# EAGLE board Print (EAGLE 9.6.2)
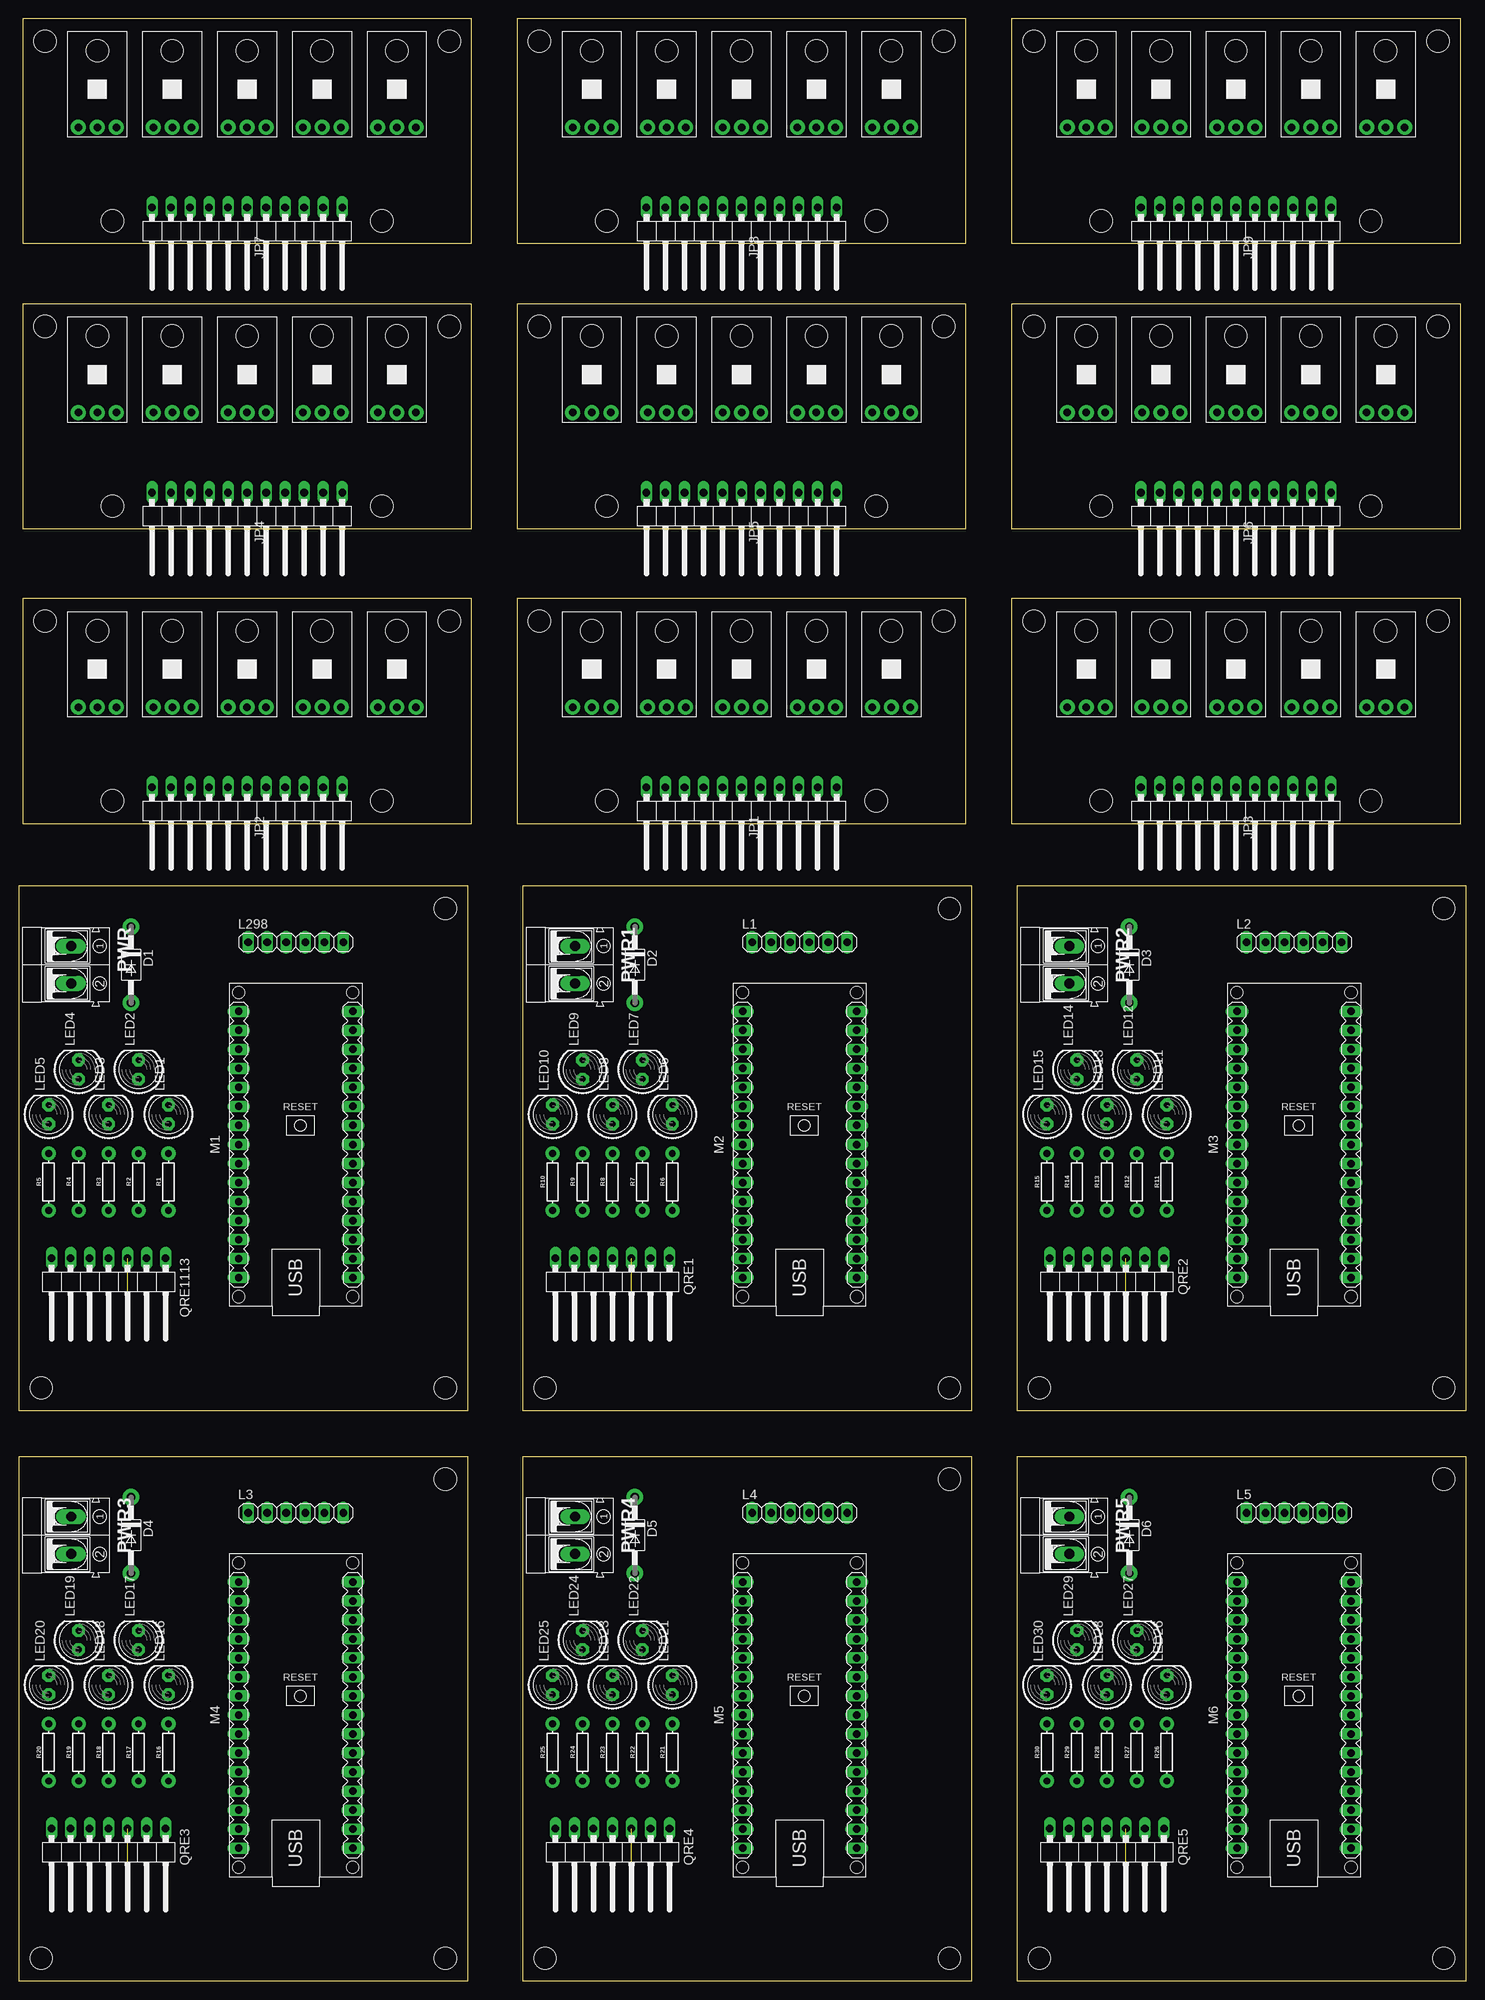
[diagram p0: board, top side]
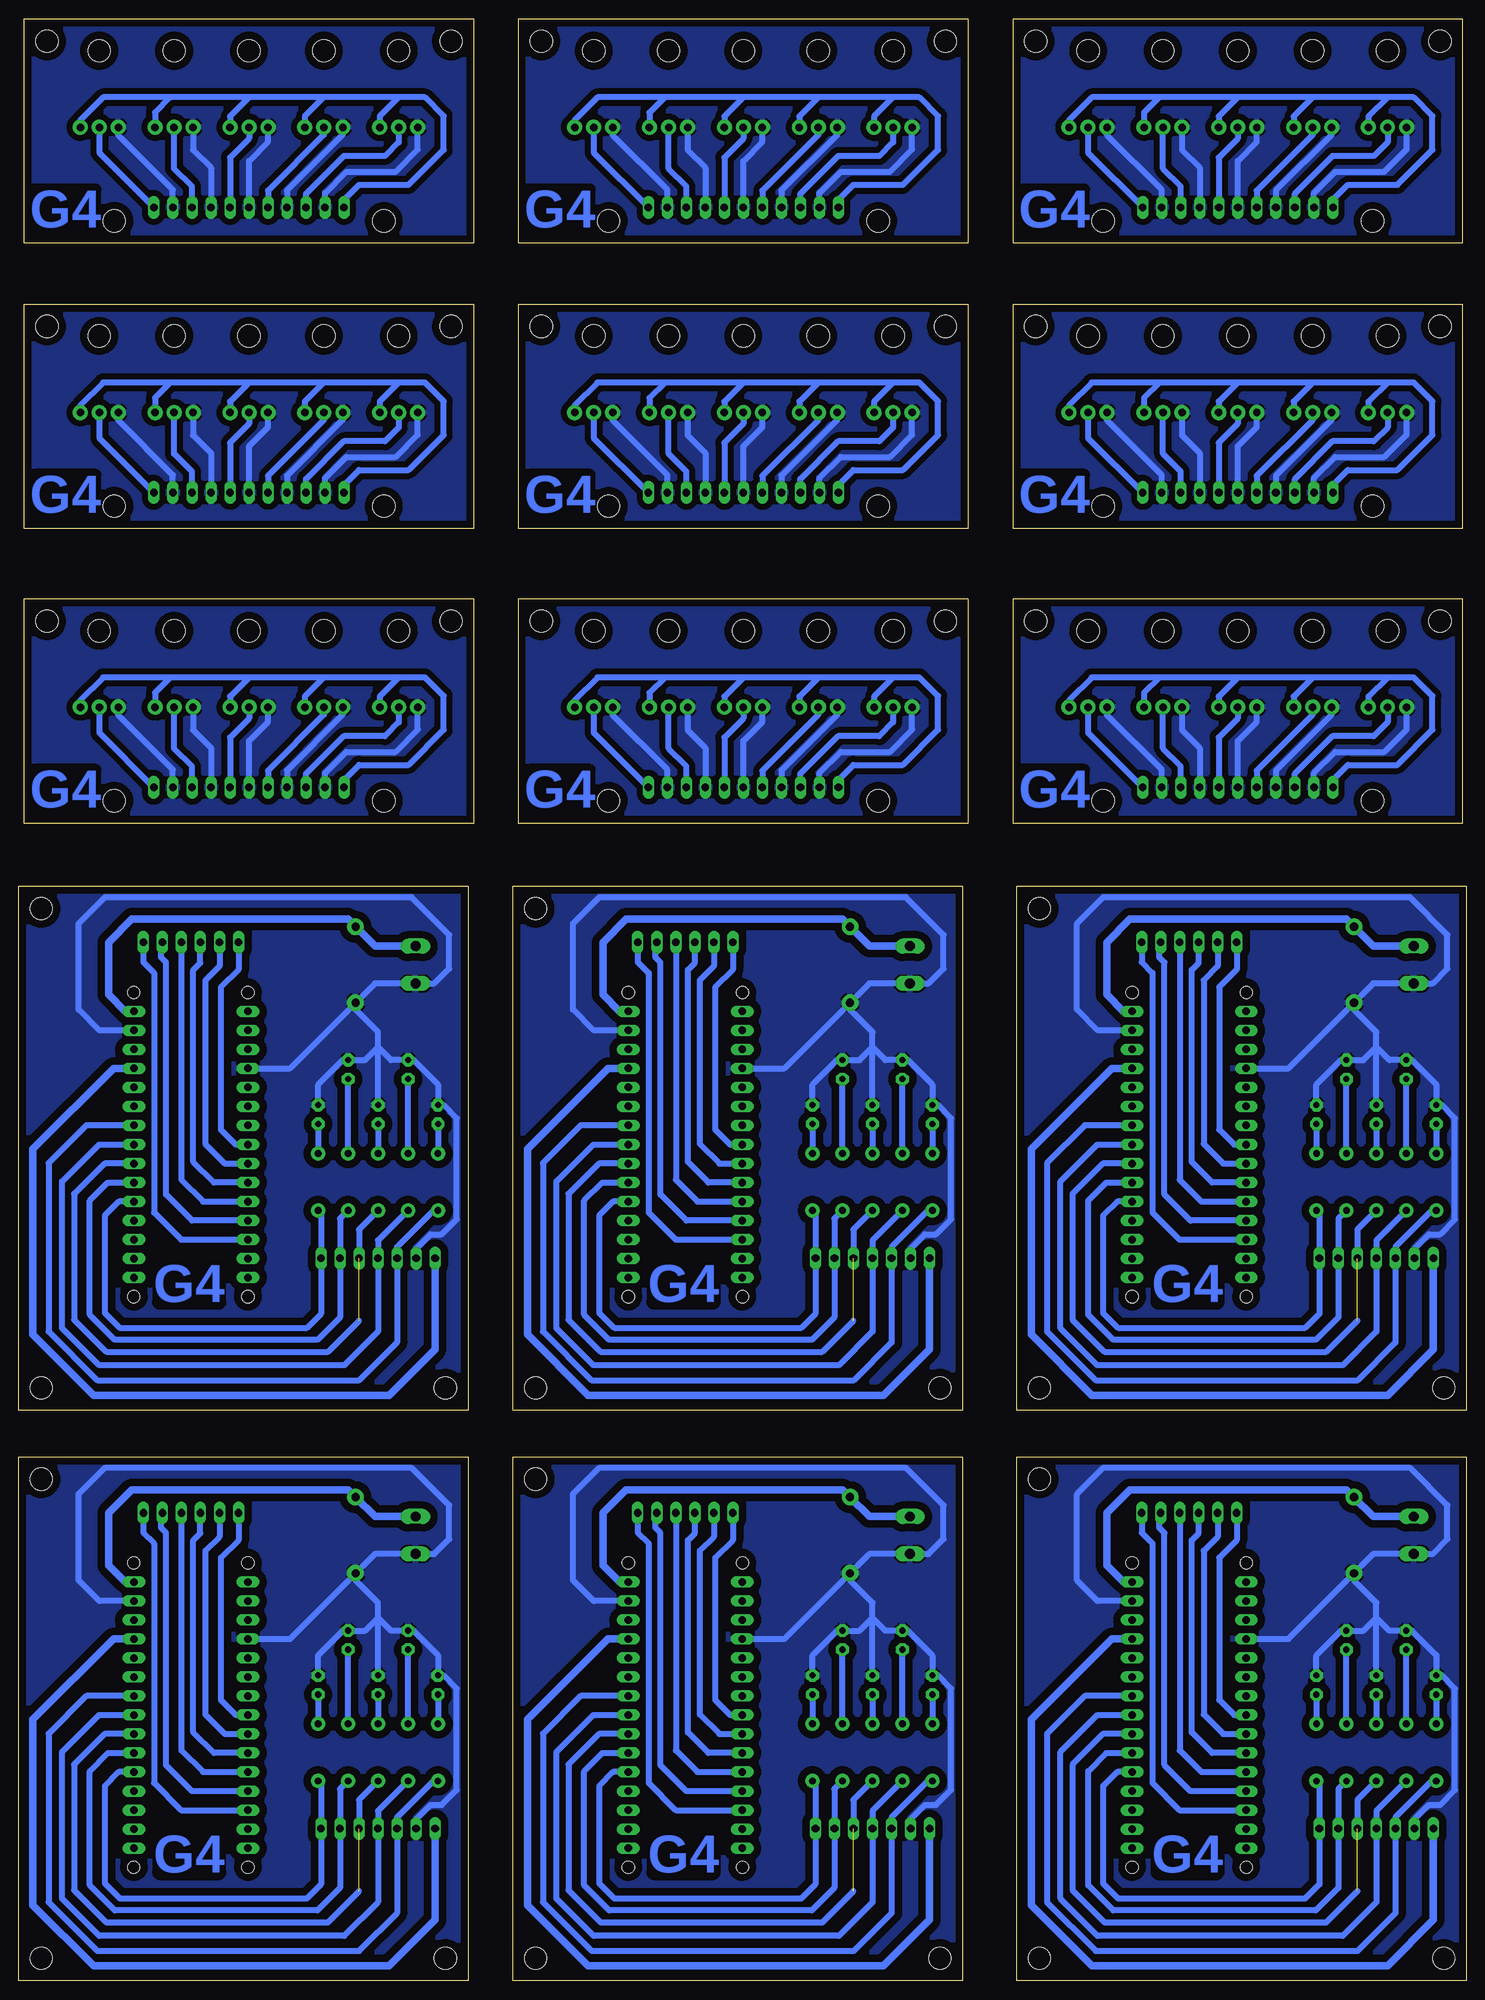
[diagram p1: board, bottom side, seen from below]

Size 193.35 x 262.06 mm. Coordinates in mm from the lower left corner, seen from the top.
Outline: 0.51,154.59 60.51,154.59 60.51,184.59 0.51,184.59 0.51,154.59
Outline: 0,76.2 60,76.2 60,146.2 0,146.2 0,76.2
Outline: 67.31,76.2 127.31,76.2 127.31,146.2 67.31,146.2 67.31,76.2
Outline: 133.35,76.2 193.35,76.2 193.35,146.2 133.35,146.2 133.35,76.2
Outline: 0,0 60,0 60,70 0,70 0,0
Outline: 67.31,0 127.31,0 127.31,70 67.31,70 67.31,0
Outline: 133.35,0 193.35,0 193.35,70 133.35,70 133.35,0
Outline: 66.55,154.59 126.55,154.59 126.55,184.59 66.55,184.59 66.55,154.59
Outline: 132.59,154.59 192.59,154.59 192.59,184.59 132.59,184.59 132.59,154.59
Outline: 0.51,193.96 60.51,193.96 60.51,223.96 0.51,223.96 0.51,193.96
Outline: 66.55,193.96 126.55,193.96 126.55,223.96 66.55,223.96 66.55,193.96
Outline: 132.59,193.96 192.59,193.96 192.59,223.96 132.59,223.96 132.59,193.96
Outline: 0.51,232.06 60.51,232.06 60.51,262.06 0.51,262.06 0.51,232.06
Outline: 66.55,232.06 126.55,232.06 126.55,262.06 66.55,262.06 66.55,232.06
Outline: 132.59,232.06 192.59,232.06 192.59,262.06 132.59,262.06 132.59,232.06
Copper layers (1*16): Top 0.035mm / dielectric 1.5mm / Bottom 0.035mm
Design rules "default": minimum track width 6mil, minimum drill 0.35mm, track to track 6mil, track to pad 6mil, pad to pad 6mil, via to via 6mil, smd to smd 6mil, copper to edge 40mil, drill to drill 6mil, minimum pad ring 10mil, minimum via ring 8mil, stop-mask expansion 4mil, vias tented up to drill 0mil, thermal gap 10mil
Holes 3 mm at 12.51,157.59 48.51,157.59 57.51,181.59 3.51,181.59 3,79.2 57,79.2 57,143.2 70.31,79.2 124.31,79.2 124.31,143.2 136.35,79.2 190.35,79.2 190.35,143.2 3,3 57,3 57,67 70.31,3 124.31,3 124.31,67 136.35,3 190.35,3 190.35,67 78.55,157.59 114.55,157.59 123.55,181.59 69.55,181.59 144.59,157.59 180.59,157.59 189.59,181.59 135.59,181.59 12.51,196.96 48.51,196.96 57.51,220.96 3.51,220.96 78.55,196.96 114.55,196.96 123.55,220.96 69.55,220.96 144.59,196.96 180.59,196.96 189.59,220.96 135.59,220.96 12.51,235.06 48.51,235.06 57.51,259.06 3.51,259.06 78.55,235.06 114.55,235.06 123.55,259.06 69.55,259.06 144.59,235.06 180.59,235.06 189.59,259.06 135.59,259.06

## Footprints (pad centres in the part's own frame; a part is rotated, then mirrored left to right if it is on the bottom)
DO41-10 = drill 1.118 pad 2.2: A 5.08,0; C -5.08,0
1X11/90 = drill 1.016 long: 1 -12.7,-3.81; 2 -10.16,-3.81; 3 -7.62,-3.81; 4 -5.08,-3.81; 5 -2.54,-3.81; 6 0,-3.81; 7 2.54,-3.81; 8 5.08,-3.81; 9 7.62,-3.81; 10 10.16,-3.81; 11 12.7,-3.81
1X06 = drill 1.016 long: 1 -6.35,0; 2 -3.81,0; 3 -1.27,0; 4 1.27,0; 5 3.81,0; 6 6.35,0
LED5MM = drill 0.813 pad 1.7 octagon: A -1.27,0; K 1.27,0
ARDUINO-NANO-3.0 = drill 1 long: J1.1 17.78,7.62; J1.2 15.24,7.62; J1.3 12.7,7.62; J1.4 10.16,7.62; J1.5 7.62,7.62; J1.6 5.08,7.62; J1.7 2.54,7.62; J1.8 0,7.62; J1.9 -2.54,7.62; J1.10 -5.08,7.62; J1.11 -7.62,7.62; J1.12 -10.16,7.62; J1.13 -12.7,7.62; J1.14 -15.24,7.62; J1.15 -17.78,7.62; J2.1 17.78,-7.62; J2.2 15.24,-7.62; J2.3 12.7,-7.62; J2.4 10.16,-7.62; J2.5 7.62,-7.62; J2.6 5.08,-7.62; J2.7 2.54,-7.62; J2.8 0,-7.62; J2.9 -2.54,-7.62; J2.10 -5.08,-7.62; J2.11 -7.62,-7.62; J2.12 -10.16,-7.62; J2.13 -12.7,-7.62; J2.14 -15.24,-7.62; J2.15 -17.78,-7.62 | hole 1.651: -20.32,7.62; -20.32,-7.62; 20.32,-7.62; 20.32,7.62
2P = drill 1.321 long: 1 -2.5,0; 2 2.5,0
1X07/90 = drill 1.016 long: 1 -7.62,-3.81; 2 -5.08,-3.81; 3 -2.54,-3.81; 4 0,-3.81; 5 2.54,-3.81; 6 5.08,-3.81; 7 7.62,-3.81
AXIAL-0.3 = drill 0.9 pad 1.88: P$1 -3.81,0; P$2 3.81,0
QRE1113 = drill 1 pad 2: GND -2.54,0; OUT 0,0; VCC 2.54,0 | hole 3: 0,10.23

## Placement (x,y rotation side)
D1  1N4004  [DO41-10]  15,135.7 270 top
D2  1N4004  [DO41-10]  82.31,135.7 270 top
D3  1N4004  [DO41-10]  148.35,135.7 270 top
D4  1N4004  [DO41-10]  15,59.5 270 top
D5  1N4004  [DO41-10]  82.31,59.5 270 top
D6  1N4004  [DO41-10]  148.35,59.5 270 top
JP1  [1X11/90]  96.55,155.59 180 top
JP2  [1X11/90]  30.51,155.59 180 top
JP3  [1X11/90]  162.59,155.59 180 top
JP4  [1X11/90]  30.51,194.96 180 top
JP5  [1X11/90]  96.55,194.96 180 top
JP6  [1X11/90]  162.59,194.96 180 top
JP7  [1X11/90]  30.51,233.06 180 top
JP8  [1X11/90]  96.55,233.06 180 top
JP9  [1X11/90]  162.59,233.06 180 top
L1  [1X06]  104.31,138.7 0 top
L2  [1X06]  170.35,138.7 0 top
L3  [1X06]  37,62.5 0 top
L4  [1X06]  104.31,62.5 0 top
L5  [1X06]  170.35,62.5 0 top
L298  [1X06]  37,138.7 0 top
LED1  [LED5MM]  20,115.7 90 top
LED2  [LED5MM]  16,121.7 90 top
LED3  [LED5MM]  12,115.7 90 top
LED4  [LED5MM]  8,121.7 90 top
LED5  [LED5MM]  4,115.7 90 top
LED6  [LED5MM]  87.31,115.7 90 top
LED7  [LED5MM]  83.31,121.7 90 top
LED8  [LED5MM]  79.31,115.7 90 top
LED9  [LED5MM]  75.31,121.7 90 top
LED10  [LED5MM]  71.31,115.7 90 top
LED11  [LED5MM]  153.35,115.7 90 top
LED12  [LED5MM]  149.35,121.7 90 top
LED13  [LED5MM]  145.35,115.7 90 top
LED14  [LED5MM]  141.35,121.7 90 top
LED15  [LED5MM]  137.35,115.7 90 top
LED16  [LED5MM]  20,39.5 90 top
LED17  [LED5MM]  16,45.5 90 top
LED18  [LED5MM]  12,39.5 90 top
LED19  [LED5MM]  8,45.5 90 top
LED20  [LED5MM]  4,39.5 90 top
LED21  [LED5MM]  87.31,39.5 90 top
LED22  [LED5MM]  83.31,45.5 90 top
LED23  [LED5MM]  79.31,39.5 90 top
LED24  [LED5MM]  75.31,45.5 90 top
LED25  [LED5MM]  71.31,39.5 90 top
LED26  [LED5MM]  153.35,39.5 90 top
LED27  [LED5MM]  149.35,45.5 90 top
LED28  [LED5MM]  145.35,39.5 90 top
LED29  [LED5MM]  141.35,45.5 90 top
LED30  [LED5MM]  137.35,39.5 90 top
M1  ARDUINO-NANO-3.0  [ARDUINO-NANO-3.0]  37,111.7 90 top
M2  ARDUINO-NANO-3.0  [ARDUINO-NANO-3.0]  104.31,111.7 90 top
M3  ARDUINO-NANO-3.0  [ARDUINO-NANO-3.0]  170.35,111.7 90 top
M4  ARDUINO-NANO-3.0  [ARDUINO-NANO-3.0]  37,35.5 90 top
M5  ARDUINO-NANO-3.0  [ARDUINO-NANO-3.0]  104.31,35.5 90 top
M6  ARDUINO-NANO-3.0  [ARDUINO-NANO-3.0]  170.35,35.5 90 top
PWR  [2P]  7,135.7 270 top
PWR1  [2P]  74.31,135.7 270 top
PWR2  [2P]  140.35,135.7 270 top
PWR3  [2P]  7,59.5 270 top
PWR4  [2P]  74.31,59.5 270 top
PWR5  [2P]  140.35,59.5 270 top
QRE1  [1X07/90]  79.31,92.7 180 top
QRE2  [1X07/90]  145.35,92.7 180 top
QRE3  [1X07/90]  12,16.5 180 top
QRE4  [1X07/90]  79.31,16.5 180 top
QRE5  [1X07/90]  145.35,16.5 180 top
QRE1113  [1X07/90]  12,92.7 180 top
R1  1k  [AXIAL-0.3]  20,106.7 90 top
R2  1k  [AXIAL-0.3]  16,106.7 90 top
R3  1k  [AXIAL-0.3]  12,106.7 90 top
R4  1k  [AXIAL-0.3]  8,106.7 90 top
R5  1k  [AXIAL-0.3]  4,106.7 90 top
R6  1k  [AXIAL-0.3]  87.31,106.7 90 top
R7  1k  [AXIAL-0.3]  83.31,106.7 90 top
R8  1k  [AXIAL-0.3]  79.31,106.7 90 top
R9  1k  [AXIAL-0.3]  75.31,106.7 90 top
R10  1k  [AXIAL-0.3]  71.31,106.7 90 top
R11  1k  [AXIAL-0.3]  153.35,106.7 90 top
R12  1k  [AXIAL-0.3]  149.35,106.7 90 top
R13  1k  [AXIAL-0.3]  145.35,106.7 90 top
R14  1k  [AXIAL-0.3]  141.35,106.7 90 top
R15  1k  [AXIAL-0.3]  137.35,106.7 90 top
R16  1k  [AXIAL-0.3]  20,30.5 90 top
R17  1k  [AXIAL-0.3]  16,30.5 90 top
R18  1k  [AXIAL-0.3]  12,30.5 90 top
R19  1k  [AXIAL-0.3]  8,30.5 90 top
R20  1k  [AXIAL-0.3]  4,30.5 90 top
R21  1k  [AXIAL-0.3]  87.31,30.5 90 top
R22  1k  [AXIAL-0.3]  83.31,30.5 90 top
R23  1k  [AXIAL-0.3]  79.31,30.5 90 top
R24  1k  [AXIAL-0.3]  75.31,30.5 90 top
R25  1k  [AXIAL-0.3]  71.31,30.5 90 top
R26  1k  [AXIAL-0.3]  153.35,30.5 90 top
R27  1k  [AXIAL-0.3]  149.35,30.5 90 top
R28  1k  [AXIAL-0.3]  145.35,30.5 90 top
R29  1k  [AXIAL-0.3]  141.35,30.5 90 top
R30  1k  [AXIAL-0.3]  137.35,30.5 90 top
U1  QRE1113  [QRE1113]  10.51,170.09 0 top
U2  QRE1113  [QRE1113]  20.51,170.09 0 top
U3  QRE1113  [QRE1113]  30.51,170.09 0 top
U4  QRE1113  [QRE1113]  40.51,170.09 0 top
U5  QRE1113  [QRE1113]  50.51,170.09 0 top
U6  QRE1113  [QRE1113]  76.55,170.09 0 top
U7  QRE1113  [QRE1113]  86.55,170.09 0 top
U8  QRE1113  [QRE1113]  96.55,170.09 0 top
U9  QRE1113  [QRE1113]  106.55,170.09 0 top
U10  QRE1113  [QRE1113]  116.55,170.09 0 top
U11  QRE1113  [QRE1113]  142.59,170.09 0 top
U12  QRE1113  [QRE1113]  152.59,170.09 0 top
U13  QRE1113  [QRE1113]  162.59,170.09 0 top
U14  QRE1113  [QRE1113]  172.59,170.09 0 top
U15  QRE1113  [QRE1113]  182.59,170.09 0 top
U16  QRE1113  [QRE1113]  10.51,209.46 0 top
U17  QRE1113  [QRE1113]  20.51,209.46 0 top
U18  QRE1113  [QRE1113]  30.51,209.46 0 top
U19  QRE1113  [QRE1113]  40.51,209.46 0 top
U20  QRE1113  [QRE1113]  50.51,209.46 0 top
U21  QRE1113  [QRE1113]  76.55,209.46 0 top
U22  QRE1113  [QRE1113]  86.55,209.46 0 top
U23  QRE1113  [QRE1113]  96.55,209.46 0 top
U24  QRE1113  [QRE1113]  106.55,209.46 0 top
U25  QRE1113  [QRE1113]  116.55,209.46 0 top
U26  QRE1113  [QRE1113]  142.59,209.46 0 top
U27  QRE1113  [QRE1113]  152.59,209.46 0 top
U28  QRE1113  [QRE1113]  162.59,209.46 0 top
U29  QRE1113  [QRE1113]  172.59,209.46 0 top
U30  QRE1113  [QRE1113]  182.59,209.46 0 top
U31  QRE1113  [QRE1113]  10.51,247.56 0 top
U32  QRE1113  [QRE1113]  20.51,247.56 0 top
U33  QRE1113  [QRE1113]  30.51,247.56 0 top
U34  QRE1113  [QRE1113]  40.51,247.56 0 top
U35  QRE1113  [QRE1113]  50.51,247.56 0 top
U36  QRE1113  [QRE1113]  76.55,247.56 0 top
U37  QRE1113  [QRE1113]  86.55,247.56 0 top
U38  QRE1113  [QRE1113]  96.55,247.56 0 top
U39  QRE1113  [QRE1113]  106.55,247.56 0 top
U40  QRE1113  [QRE1113]  116.55,247.56 0 top
U41  QRE1113  [QRE1113]  142.59,247.56 0 top
U42  QRE1113  [QRE1113]  152.59,247.56 0 top
U43  QRE1113  [QRE1113]  162.59,247.56 0 top
U44  QRE1113  [QRE1113]  172.59,247.56 0 top
U45  QRE1113  [QRE1113]  182.59,247.56 0 top

## Library data of the parts
D1-D6 = diode
JP1-JP9 L1-L5 L298 QRE1-QRE5 QRE1113 = pinhead
LED1-LED30 = led
M1-M6 = Modules
PWR PWR1-PWR5 = Terminal Block
R1-R30 = SparkFun-Resistors
U1-U45 = IR Sensors

## Nets
5V: M1.J2.4 QRE1113.7
5V1: M2.J2.4 QRE1.7
5V2: M3.J2.4 QRE2.7
5V3: M4.J2.4 QRE3.7
5V4: M5.J2.4 QRE4.7
5V5: M6.J2.4 QRE5.7
D1: JP2.9 U1.OUT
D2: JP2.7 U2.OUT
D3: JP2.5 U3.OUT
D4: JP2.3 U4.OUT
D5: JP2.1 U5.OUT
D6: M1.J2.10 QRE1113.2 R2.P$1
D7: M1.J2.11 QRE1113.1 R1.P$1
D8: M1.J2.7 QRE1113.5 R5.P$1
D9: M1.J2.8 QRE1113.4 R4.P$1
D10: M1.J2.9 QRE1113.3 R3.P$1
D11: M2.J2.10 QRE1.2 R7.P$1
D12: M2.J2.11 QRE1.1 R6.P$1
D13: M2.J2.7 QRE1.5 R10.P$1
D14: M2.J2.8 QRE1.4 R9.P$1
D15: M2.J2.9 QRE1.3 R8.P$1
D16: M3.J2.10 QRE2.2 R12.P$1
D17: M3.J2.11 QRE2.1 R11.P$1
D18: M3.J2.7 QRE2.5 R15.P$1
D19: M3.J2.8 QRE2.4 R14.P$1
D20: M3.J2.9 QRE2.3 R13.P$1
D21: M4.J2.10 QRE3.2 R17.P$1
D22: M4.J2.11 QRE3.1 R16.P$1
D23: M4.J2.7 QRE3.5 R20.P$1
D24: M4.J2.8 QRE3.4 R19.P$1
D25: M4.J2.9 QRE3.3 R18.P$1
D26: M5.J2.10 QRE4.2 R22.P$1
D27: M5.J2.11 QRE4.1 R21.P$1
D28: M5.J2.7 QRE4.5 R25.P$1
D29: M5.J2.8 QRE4.4 R24.P$1
D30: M5.J2.9 QRE4.3 R23.P$1
D31: M6.J2.10 QRE5.2 R27.P$1
D32: M6.J2.11 QRE5.1 R26.P$1
D33: M6.J2.7 QRE5.5 R30.P$1
D34: M6.J2.8 QRE5.4 R29.P$1
D35: M6.J2.9 QRE5.3 R28.P$1
D36: JP1.1 U10.OUT
D37: JP1.3 U9.OUT
D38: JP1.5 U8.OUT
D39: JP1.7 U7.OUT
D40: JP1.9 U6.OUT
D41: JP3.1 U15.OUT
D42: JP3.3 U14.OUT
D43: JP3.5 U13.OUT
D44: JP3.7 U12.OUT
D45: JP3.9 U11.OUT
D46: JP4.1 U20.OUT
D47: JP4.3 U19.OUT
D48: JP4.5 U18.OUT
D49: JP4.7 U17.OUT
D50: JP4.9 U16.OUT
D51: JP5.1 U25.OUT
D52: JP5.3 U24.OUT
D53: JP5.5 U23.OUT
D54: JP5.7 U22.OUT
D55: JP5.9 U21.OUT
D56: JP6.1 U30.OUT
D57: JP6.3 U29.OUT
D58: JP6.5 U28.OUT
D59: JP6.7 U27.OUT
D60: JP6.9 U26.OUT
D61: JP7.1 U35.OUT
D62: JP7.3 U34.OUT
D63: JP7.5 U33.OUT
D64: JP7.7 U32.OUT
D65: JP7.9 U31.OUT
D66: JP8.1 U40.OUT
D67: JP8.3 U39.OUT
D68: JP8.5 U38.OUT
D69: JP8.7 U37.OUT
D70: JP8.9 U36.OUT
D71: JP9.1 U45.OUT
D72: JP9.3 U44.OUT
D73: JP9.5 U43.OUT
D74: JP9.7 U42.OUT
D75: JP9.9 U41.OUT
ENA: L298.1 M1.J1.8
ENA1: L1.1 M2.J1.8
ENA2: L2.1 M3.J1.8
ENA3: L3.1 M4.J1.8
ENA4: L4.1 M5.J1.8
ENA5: L5.1 M6.J1.8
ENB: L298.6 M1.J1.13
ENB1: L1.6 M2.J1.13
ENB2: L2.6 M3.J1.13
ENB3: L3.6 M4.J1.13
ENB4: L4.6 M5.J1.13
ENB5: L5.6 M6.J1.13
GND: JP2.2 JP2.4 JP2.6 JP2.8 JP2.10 U1.GND U2.GND U3.GND U4.GND U5.GND
GND1: D1.A LED1.K LED2.K LED3.K LED4.K LED5.K M1.J1.4 M1.J2.2 PWR.2 QRE1113.6
GND2: D2.A LED6.K LED7.K LED8.K LED9.K LED10.K M2.J1.4 M2.J2.2 PWR1.2 QRE1.6
GND3: D3.A LED11.K LED12.K LED13.K LED14.K LED15.K M3.J1.4 M3.J2.2 PWR2.2 QRE2.6
GND4: D4.A LED16.K LED17.K LED18.K LED19.K LED20.K M4.J1.4 M4.J2.2 PWR3.2 QRE3.6
GND5: D5.A LED21.K LED22.K LED23.K LED24.K LED25.K M5.J1.4 M5.J2.2 PWR4.2 QRE4.6
GND6: D6.A LED26.K LED27.K LED28.K LED29.K LED30.K M6.J1.4 M6.J2.2 PWR5.2 QRE5.6
GND7: JP1.2 JP1.4 JP1.6 JP1.8 JP1.10 U6.GND U7.GND U8.GND U9.GND U10.GND
GND8: JP3.2 JP3.4 JP3.6 JP3.8 JP3.10 U11.GND U12.GND U13.GND U14.GND U15.GND
GND9: JP4.2 JP4.4 JP4.6 JP4.8 JP4.10 U16.GND U17.GND U18.GND U19.GND U20.GND
GND10: JP5.2 JP5.4 JP5.6 JP5.8 JP5.10 U21.GND U22.GND U23.GND U24.GND U25.GND
GND11: JP6.2 JP6.4 JP6.6 JP6.8 JP6.10 U26.GND U27.GND U28.GND U29.GND U30.GND
GND12: JP7.2 JP7.4 JP7.6 JP7.8 JP7.10 U31.GND U32.GND U33.GND U34.GND U35.GND
GND13: JP8.2 JP8.4 JP8.6 JP8.8 JP8.10 U36.GND U37.GND U38.GND U39.GND U40.GND
GND14: JP9.2 JP9.4 JP9.6 JP9.8 JP9.10 U41.GND U42.GND U43.GND U44.GND U45.GND
IN1: L298.2 M1.J1.9
IN2: L298.3 M1.J1.10
IN3: L298.4 M1.J1.11
IN4: L298.5 M1.J1.12
IN5: L1.2 M2.J1.9
IN6: L1.3 M2.J1.10
IN7: L1.4 M2.J1.11
IN8: L1.5 M2.J1.12
IN9: L2.2 M3.J1.9
IN10: L2.3 M3.J1.10
IN11: L2.4 M3.J1.11
IN12: L2.5 M3.J1.12
IN13: L3.2 M4.J1.9
IN14: L3.3 M4.J1.10
IN15: L3.4 M4.J1.11
IN16: L3.5 M4.J1.12
IN17: L4.2 M5.J1.9
IN18: L4.3 M5.J1.10
IN19: L4.4 M5.J1.11
IN20: L4.5 M5.J1.12
IN21: L5.2 M6.J1.9
IN22: L5.3 M6.J1.10
IN23: L5.4 M6.J1.11
IN24: L5.5 M6.J1.12
M1_3V1: M2.J2.14
M1_3V2: M3.J2.14
M1_3V3: M1.J2.14
M1_3V4: M4.J2.14
M1_3V5: M5.J2.14
M1_3V6: M6.J2.14
M1_A0: M1.J2.12
M1_A1: M2.J2.5
M1_A2: M2.J2.6
M1_A3: M2.J2.12
M1_A4: M3.J2.5
M1_A5: M3.J2.6
M1_A6: M1.J2.6
M1_A7: M1.J2.5
M1_A8: M3.J2.12
M1_A9: M4.J2.5
M1_A10: M4.J2.6
M1_A11: M4.J2.12
M1_A12: M5.J2.5
M1_A13: M5.J2.6
M1_A14: M5.J2.12
M1_A15: M6.J2.5
M1_A16: M6.J2.6
M1_A17: M6.J2.12
M1_AREF: M1.J2.13
M1_AREF1: M2.J2.13
M1_AREF2: M3.J2.13
M1_AREF3: M4.J2.13
M1_AREF4: M5.J2.13
M1_AREF5: M6.J2.13
M1_D0/RX: M1.J1.2
M1_D0/RX1: M2.J1.2
M1_D0/RX2: M3.J1.2
M1_D0/RX3: M4.J1.2
M1_D0/RX4: M5.J1.2
M1_D0/RX5: M6.J1.2
M1_D1: M2.J1.5
M1_D1/TX: M1.J1.1
M1_D1/TX1: M2.J1.1
M1_D1/TX2: M3.J1.1
M1_D1/TX3: M4.J1.1
M1_D1/TX4: M5.J1.1
M1_D1/TX5: M6.J1.1
M1_D2: M1.J1.5
M1_D3: M1.J1.6
M1_D4: M1.J1.7
M1_D5: M2.J1.6
M1_D6: M2.J1.7
M1_D7: M3.J1.5
M1_D8: M3.J1.6
M1_D9: M3.J1.7
M1_D10: M4.J1.5
M1_D11: M4.J1.6
M1_D11/MOSI: M1.J1.14
M1_D11/MOSI1: M2.J1.14
M1_D11/MOSI2: M3.J1.14
M1_D11/MOSI3: M4.J1.14
M1_D11/MOSI4: M5.J1.14
M1_D11/MOSI5: M6.J1.14
M1_D12: M4.J1.7
M1_D12/MISO: M1.J1.15
M1_D12/MISO1: M2.J1.15
M1_D12/MISO2: M3.J1.15
M1_D12/MISO3: M4.J1.15
M1_D12/MISO4: M5.J1.15
M1_D12/MISO5: M6.J1.15
M1_D13: M5.J1.5
M1_D13/SCK: M1.J2.15
M1_D13/SCK1: M2.J2.15
M1_D13/SCK2: M3.J2.15
M1_D13/SCK3: M4.J2.15
M1_D13/SCK4: M5.J2.15
M1_D13/SCK5: M6.J2.15
M1_D14: M5.J1.6
M1_D15: M5.J1.7
M1_D16: M6.J1.5
M1_D17: M6.J1.6
M1_D18: M6.J1.7
M1_RST.1: M1.J1.3
M1_RST.2: M1.J2.3
M1_RST.3: M2.J1.3
M1_RST.4: M2.J2.3
M1_RST.5: M3.J1.3
M1_RST.6: M3.J2.3
M1_RST.7: M4.J1.3
M1_RST.8: M4.J2.3
M1_RST.9: M5.J1.3
M1_RST.10: M5.J2.3
M1_RST.11: M6.J1.3
M1_RST.12: M6.J2.3
N$1: LED1.A R1.P$2
N$2: LED2.A R2.P$2
N$3: LED3.A R3.P$2
N$4: LED4.A R4.P$2
N$5: LED5.A R5.P$2
N$6: LED6.A R6.P$2
N$7: LED7.A R7.P$2
N$8: LED8.A R8.P$2
N$9: LED9.A R9.P$2
N$10: LED10.A R10.P$2
N$11: LED11.A R11.P$2
N$12: LED12.A R12.P$2
N$13: LED13.A R13.P$2
N$14: LED14.A R14.P$2
N$15: LED15.A R15.P$2
N$16: LED16.A R16.P$2
N$17: LED17.A R17.P$2
N$18: LED18.A R18.P$2
N$19: LED19.A R19.P$2
N$20: LED20.A R20.P$2
N$21: LED21.A R21.P$2
N$22: LED22.A R22.P$2
N$23: LED23.A R23.P$2
N$24: LED24.A R24.P$2
N$25: LED25.A R25.P$2
N$26: LED26.A R26.P$2
N$27: LED27.A R27.P$2
N$28: LED28.A R28.P$2
N$29: LED29.A R29.P$2
N$30: LED30.A R30.P$2
VCC: JP2.11 U1.VCC U2.VCC U3.VCC U4.VCC U5.VCC
VCC1: JP1.11 U6.VCC U7.VCC U8.VCC U9.VCC U10.VCC
VCC2: JP3.11 U11.VCC U12.VCC U13.VCC U14.VCC U15.VCC
VCC3: JP4.11 U16.VCC U17.VCC U18.VCC U19.VCC U20.VCC
VCC4: JP5.11 U21.VCC U22.VCC U23.VCC U24.VCC U25.VCC
VCC5: JP6.11 U26.VCC U27.VCC U28.VCC U29.VCC U30.VCC
VCC6: JP7.11 U31.VCC U32.VCC U33.VCC U34.VCC U35.VCC
VCC7: JP8.11 U36.VCC U37.VCC U38.VCC U39.VCC U40.VCC
VCC8: JP9.11 U41.VCC U42.VCC U43.VCC U44.VCC U45.VCC
VIN: D1.C M1.J2.1 PWR.1
VIN1: D2.C M2.J2.1 PWR1.1
VIN2: D3.C M3.J2.1 PWR2.1
VIN3: D4.C M4.J2.1 PWR3.1
VIN4: D5.C M5.J2.1 PWR4.1
VIN5: D6.C M6.J2.1 PWR5.1

## Tracks (layer width: path | path; a pad name or v marks a point on that pad's centre or on a via)
5V
  Bottom 1.016: M1.J2.4 47.34,121.86 58.1,111.1 58.1,86.3 50,78.2 10.5,78.2 4.38,84.32 QRE1113.7
5V1
  Bottom 1.016: M2.J2.4 114.65,121.86 125.41,111.1 125.41,86.3 117.31,78.2 77.81,78.2 71.69,84.32 QRE1.7
5V2
  Bottom 1.016: M3.J2.4 180.69,121.86 191.45,111.1 191.45,86.3 183.35,78.2 143.85,78.2 137.73,84.32 QRE2.7
5V3
  Bottom 1.016: M4.J2.4 47.34,45.66 58.1,34.9 58.1,10.1 50,2 10.5,2 4.38,8.12 QRE3.7
5V4
  Bottom 1.016: M5.J2.4 114.65,45.66 125.41,34.9 125.41,10.1 117.31,2 77.81,2 71.69,8.12 QRE4.7
5V5
  Bottom 1.016: M6.J2.4 180.69,45.66 191.45,34.9 191.45,10.1 183.35,2 143.85,2 137.73,8.12 QRE5.7
D1
  Bottom 0.8: U1.OUT 10.51,168.09 12.36,166.24 17.86,166.24 22.89,161.21 JP2.9
D2
  Bottom 0.8: U2.OUT 20.51,169.09 27.97,161.63 27.97,160.59 JP2.7
D3
  Bottom 0.8: U3.OUT 30.51,168.59 33.05,166.05 JP2.5
D4
  Bottom 0.8: JP2.3 38.13,162.21 40.51,164.59 U4.OUT
D5
  Bottom 0.8: U5.OUT 50.51,166.7 JP2.1
D6
  Bottom 0.8: M1.J2.10 48.08,106.62 50.5,104.2 50.5,88.94 47.16,85.6 20.1,85.6 17.08,88.62 QRE1113.2 17.08,101.81 R2.P$1
D7
  Bottom 0.8: M1.J2.11 46.62,104.08 48.5,102.2 48.5,89.2 46.5,87.2 21.5,87.2 19.62,89.08 QRE1113.1 19.62,102.51 R1.P$1
D8
  Bottom 0.8: M1.J2.7 50.96,114.24 56,109.2 56,86.7 49.5,80.2 14.5,80.2 9.46,85.24 QRE1113.5 9.46,98.01 4.58,102.89 R5.P$1
D9
  Bottom 0.8: M1.J2.8 49.26,111.7 54.2,106.76 54.2,87.16 49.24,82.2 16.5,82.2 12,86.7 QRE1113.4 12,98.89 R4.P$1
D10  (1 unrouted)
  Bottom 0.8: M1.J2.9 48.54,109.16 52.6,105.1 52.6,88.3 48.3,84 18.7,84 14.54,88.16 | R3.P$1 14.54,100.35 QRE1113.3
D11
  Bottom 0.8: M2.J2.10 115.39,106.62 117.81,104.2 117.81,88.94 114.47,85.6 87.41,85.6 84.39,88.62 QRE1.2 84.39,101.81 R7.P$1
D12
  Bottom 0.8: M2.J2.11 113.93,104.08 115.81,102.2 115.81,89.2 113.81,87.2 88.81,87.2 86.93,89.08 QRE1.1 86.93,102.51 R6.P$1
D13
  Bottom 0.8: M2.J2.7 118.27,114.24 123.31,109.2 123.31,86.7 116.81,80.2 81.81,80.2 76.77,85.24 QRE1.5 76.77,98.01 71.89,102.89 R10.P$1
D14
  Bottom 0.8: M2.J2.8 116.57,111.7 121.51,106.76 121.51,87.16 116.55,82.2 83.81,82.2 79.31,86.7 QRE1.4 79.31,98.89 R9.P$1
D15  (1 unrouted)
  Bottom 0.8: M2.J2.9 115.85,109.16 119.91,105.1 119.91,88.3 115.61,84 86.01,84 81.85,88.16 | R8.P$1 81.85,100.35 QRE1.3
D16
  Bottom 0.8: M3.J2.10 181.43,106.62 183.85,104.2 183.85,88.94 180.51,85.6 153.45,85.6 150.43,88.62 QRE2.2 150.43,101.81 R12.P$1
D17
  Bottom 0.8: M3.J2.11 179.97,104.08 181.85,102.2 181.85,89.2 179.85,87.2 154.85,87.2 152.97,89.08 QRE2.1 152.97,102.51 R11.P$1
D18
  Bottom 0.8: M3.J2.7 184.31,114.24 189.35,109.2 189.35,86.7 182.85,80.2 147.85,80.2 142.81,85.24 QRE2.5 142.81,98.01 137.93,102.89 R15.P$1
D19
  Bottom 0.8: M3.J2.8 182.61,111.7 187.55,106.76 187.55,87.16 182.59,82.2 149.85,82.2 145.35,86.7 QRE2.4 145.35,98.89 R14.P$1
D20  (1 unrouted)
  Bottom 0.8: M3.J2.9 181.89,109.16 185.95,105.1 185.95,88.3 181.65,84 152.05,84 147.89,88.16 | R13.P$1 147.89,100.35 QRE2.3
D21
  Bottom 0.8: M4.J2.10 48.08,30.42 50.5,28 50.5,12.74 47.16,9.4 20.1,9.4 17.08,12.42 QRE3.2 17.08,25.61 R17.P$1
D22
  Bottom 0.8: M4.J2.11 46.62,27.88 48.5,26 48.5,13 46.5,11 21.5,11 19.62,12.88 QRE3.1 19.62,26.31 R16.P$1
D23
  Bottom 0.8: M4.J2.7 50.96,38.04 56,33 56,10.5 49.5,4 14.5,4 9.46,9.04 QRE3.5 9.46,21.81 4.58,26.69 R20.P$1
D24
  Bottom 0.8: M4.J2.8 49.26,35.5 54.2,30.56 54.2,10.96 49.24,6 16.5,6 12,10.5 QRE3.4 12,22.69 R19.P$1
D25  (1 unrouted)
  Bottom 0.8: M4.J2.9 48.54,32.96 52.6,28.9 52.6,12.1 48.3,7.8 18.7,7.8 14.54,11.96 | R18.P$1 14.54,24.15 QRE3.3
D26
  Bottom 0.8: M5.J2.10 115.39,30.42 117.81,28 117.81,12.74 114.47,9.4 87.41,9.4 84.39,12.42 QRE4.2 84.39,25.61 R22.P$1
D27
  Bottom 0.8: M5.J2.11 113.93,27.88 115.81,26 115.81,13 113.81,11 88.81,11 86.93,12.88 QRE4.1 86.93,26.31 R21.P$1
D28
  Bottom 0.8: M5.J2.7 118.27,38.04 123.31,33 123.31,10.5 116.81,4 81.81,4 76.77,9.04 QRE4.5 76.77,21.81 71.89,26.69 R25.P$1
D29
  Bottom 0.8: M5.J2.8 116.57,35.5 121.51,30.56 121.51,10.96 116.55,6 83.81,6 79.31,10.5 QRE4.4 79.31,22.69 R24.P$1
D30  (1 unrouted)
  Bottom 0.8: M5.J2.9 115.85,32.96 119.91,28.9 119.91,12.1 115.61,7.8 86.01,7.8 81.85,11.96 | R23.P$1 81.85,24.15 QRE4.3
D31
  Bottom 0.8: M6.J2.10 181.43,30.42 183.85,28 183.85,12.74 180.51,9.4 153.45,9.4 150.43,12.42 QRE5.2 150.43,25.61 R27.P$1
D32
  Bottom 0.8: M6.J2.11 179.97,27.88 181.85,26 181.85,13 179.85,11 154.85,11 152.97,12.88 QRE5.1 152.97,26.31 R26.P$1
D33
  Bottom 0.8: M6.J2.7 184.31,38.04 189.35,33 189.35,10.5 182.85,4 147.85,4 142.81,9.04 QRE5.5 142.81,21.81 137.93,26.69 R30.P$1
D34
  Bottom 0.8: M6.J2.8 182.61,35.5 187.55,30.56 187.55,10.96 182.59,6 149.85,6 145.35,10.5 QRE5.4 145.35,22.69 R29.P$1
D35  (1 unrouted)
  Bottom 0.8: M6.J2.9 181.89,32.96 185.95,28.9 185.95,12.1 181.65,7.8 152.05,7.8 147.89,11.96 | R28.P$1 147.89,24.15 QRE5.3
D36
  Bottom 0.8: U10.OUT 116.55,166.7 JP1.1
D37
  Bottom 0.8: JP1.3 104.17,162.21 106.55,164.59 U9.OUT
D38
  Bottom 0.8: U8.OUT 96.55,168.59 99.09,166.05 JP1.5
D39
  Bottom 0.8: U7.OUT 86.55,169.09 94.01,161.63 94.01,160.59 JP1.7
D40
  Bottom 0.8: U6.OUT 76.55,168.09 78.4,166.24 83.9,166.24 88.93,161.21 JP1.9
D41
  Bottom 0.8: U15.OUT 182.59,166.7 JP3.1
D42
  Bottom 0.8: JP3.3 170.21,162.21 172.59,164.59 U14.OUT
D43
  Bottom 0.8: U13.OUT 162.59,168.59 165.13,166.05 JP3.5
D44
  Bottom 0.8: U12.OUT 152.59,169.09 160.05,161.63 160.05,160.59 JP3.7
D45
  Bottom 0.8: U11.OUT 142.59,168.09 144.44,166.24 149.94,166.24 154.97,161.21 JP3.9
D46
  Bottom 0.8: U20.OUT 50.51,206.07 JP4.1
D47
  Bottom 0.8: JP4.3 38.13,201.58 40.51,203.96 U19.OUT
D48
  Bottom 0.8: U18.OUT 30.51,207.96 33.05,205.42 JP4.5
D49
  Bottom 0.8: U17.OUT 20.51,208.46 27.97,201 27.97,199.96 JP4.7
D50
  Bottom 0.8: U16.OUT 10.51,207.46 12.36,205.61 17.86,205.61 22.89,200.58 JP4.9
D51
  Bottom 0.8: U25.OUT 116.55,206.07 JP5.1
D52
  Bottom 0.8: JP5.3 104.17,201.58 106.55,203.96 U24.OUT
D53
  Bottom 0.8: U23.OUT 96.55,207.96 99.09,205.42 JP5.5
D54
  Bottom 0.8: U22.OUT 86.55,208.46 94.01,201 94.01,199.96 JP5.7
D55
  Bottom 0.8: U21.OUT 76.55,207.46 78.4,205.61 83.9,205.61 88.93,200.58 JP5.9
D56
  Bottom 0.8: U30.OUT 182.59,206.07 JP6.1
D57
  Bottom 0.8: JP6.3 170.21,201.58 172.59,203.96 U29.OUT
D58
  Bottom 0.8: U28.OUT 162.59,207.96 165.13,205.42 JP6.5
D59
  Bottom 0.8: U27.OUT 152.59,208.46 160.05,201 160.05,199.96 JP6.7
D60
  Bottom 0.8: U26.OUT 142.59,207.46 144.44,205.61 149.94,205.61 154.97,200.58 JP6.9
D61
  Bottom 0.8: U35.OUT 50.51,244.17 JP7.1
D62
  Bottom 0.8: JP7.3 38.13,239.68 40.51,242.06 U34.OUT
D63
  Bottom 0.8: U33.OUT 30.51,246.06 33.05,243.52 JP7.5
D64
  Bottom 0.8: U32.OUT 20.51,246.56 27.97,239.1 27.97,238.06 JP7.7
D65
  Bottom 0.8: U31.OUT 10.51,245.56 12.36,243.71 17.86,243.71 22.89,238.68 JP7.9
D66
  Bottom 0.8: U40.OUT 116.55,244.17 JP8.1
D67
  Bottom 0.8: JP8.3 104.17,239.68 106.55,242.06 U39.OUT
D68
  Bottom 0.8: U38.OUT 96.55,246.06 99.09,243.52 JP8.5
D69
  Bottom 0.8: U37.OUT 86.55,246.56 94.01,239.1 94.01,238.06 JP8.7
D70
  Bottom 0.8: U36.OUT 76.55,245.56 78.4,243.71 83.9,243.71 88.93,238.68 JP8.9
D71
  Bottom 0.8: U45.OUT 182.59,244.17 JP9.1
D72
  Bottom 0.8: JP9.3 170.21,239.68 172.59,242.06 U44.OUT
D73
  Bottom 0.8: U43.OUT 162.59,246.06 165.13,243.52 JP9.5
D74
  Bottom 0.8: U42.OUT 152.59,246.56 160.05,239.1 160.05,238.06 JP9.7
D75
  Bottom 0.8: U41.OUT 142.59,245.56 144.44,243.71 149.94,243.71 154.97,238.68 JP9.9
ENA
  Bottom 0.8: L298.1 30.65,135.05 33,132.7 33,113.7 31,111.7 M1.J1.8
ENA1
  Bottom 0.8: L1.1 97.96,135.05 100.31,132.7 100.31,113.7 98.31,111.7 M2.J1.8
ENA2
  Bottom 0.8: L2.1 164,135.05 166.35,132.7 166.35,113.7 164.35,111.7 M3.J1.8
ENA3
  Bottom 0.8: L3.1 30.65,58.85 33,56.5 33,37.5 31,35.5 M4.J1.8
ENA4
  Bottom 0.8: L4.1 97.96,58.85 100.31,56.5 100.31,37.5 98.31,35.5 M5.J1.8
ENA5
  Bottom 0.8: L5.1 164,58.85 166.35,56.5 166.35,37.5 164.35,35.5 M6.J1.8
ENB
  Bottom 0.8: L298.6 43.35,136.05 41.91,134.61 41.91,102.61 38.3,99 M1.J1.13
ENB1
  Bottom 0.8: L1.6 110.66,136.05 109.22,134.61 109.22,102.61 105.61,99 M2.J1.13
ENB2
  Bottom 0.8: L2.6 176.7,136.05 175.26,134.61 175.26,102.61 171.65,99 M3.J1.13
ENB3
  Bottom 0.8: L3.6 43.35,59.85 41.91,58.41 41.91,26.41 38.3,22.8 M4.J1.13
ENB4
  Bottom 0.8: L4.6 110.66,59.85 109.22,58.41 109.22,26.41 105.61,22.8 M5.J1.13
ENB5
  Bottom 0.8: L5.6 176.7,59.85 175.26,58.41 175.26,26.41 171.65,22.8 M6.J1.13
GND
  Bottom 0.8: JP2.8 25.43,161.67 17.97,169.13 U2.GND | JP2.10 20.35,161.3 17.51,164.14 10.96,164.14 7.97,167.13 U1.GND | JP2.6 30.51,165.59 27.97,168.13 U3.GND | U4.GND 37.97,167.05 35.59,164.67 JP2.4 | JP2.2 40.67,161.75 47.97,169.05 U5.GND
  pour Bottom (isolate 0.8): 0.51,184.59 60.51,184.59 60.51,154.59 0.51,154.59
GND1
  Bottom 0.8: LED1.K 20,119.7 16.73,122.97 LED2.K 13.73,122.97 12,124.7 | LED3.K 12,124.7 | 12,124.7 12,126.7 15,129.7 D1.A | 12,124.7 10.27,122.97 LED4.K 7.27,122.97 4,119.7 LED5.K 3.27,116.97 1.5,115.2 1.5,101.7 3.5,99.7 5,99.7 6.92,97.78 QRE1113.6 | D1.A 12.42,133.2 PWR.2 4.5,133.2 2.5,135.2 2.5,139.7 7.5,144.7 48.5,144.7 52,141.2 52,129.7 49.24,126.94 M1.J2.2 | M1.J1.4 23.76,121.86 D1.A
  pour Bottom (isolate 1): 0,146.2 60,146.2 60,76.2 0,76.2
GND2
  Bottom 0.8: LED6.K 87.31,119.7 84.04,122.97 LED7.K 81.04,122.97 79.31,124.7 | LED8.K 79.31,124.7 | 79.31,124.7 79.31,126.7 82.31,129.7 D2.A | 79.31,124.7 77.58,122.97 LED9.K 74.58,122.97 71.31,119.7 LED10.K 70.58,116.97 68.81,115.2 68.81,101.7 70.81,99.7 72.31,99.7 74.23,97.78 QRE1.6 | D2.A 79.73,133.2 PWR1.2 71.81,133.2 69.81,135.2 69.81,139.7 74.81,144.7 115.81,144.7 119.31,141.2 119.31,129.7 116.55,126.94 M2.J2.2 | M2.J1.4 91.07,121.86 D2.A
  pour Bottom (isolate 1): 67.31,146.2 127.31,146.2 127.31,76.2 67.31,76.2
GND3
  Bottom 0.8: LED11.K 153.35,119.7 150.08,122.97 LED12.K 147.08,122.97 145.35,124.7 | LED13.K 145.35,124.7 | 145.35,124.7 145.35,126.7 148.35,129.7 D3.A | 145.35,124.7 143.62,122.97 LED14.K 140.62,122.97 137.35,119.7 LED15.K 136.62,116.97 134.85,115.2 134.85,101.7 136.85,99.7 138.35,99.7 140.27,97.78 QRE2.6 | D3.A 145.77,133.2 PWR2.2 137.85,133.2 135.85,135.2 135.85,139.7 140.85,144.7 181.85,144.7 185.35,141.2 185.35,129.7 182.59,126.94 M3.J2.2 | M3.J1.4 157.11,121.86 D3.A
  pour Bottom (isolate 1): 133.35,146.2 193.35,146.2 193.35,76.2 133.35,76.2
GND4
  Bottom 0.8: LED16.K 20,43.5 16.73,46.77 LED17.K 13.73,46.77 12,48.5 | LED18.K 12,48.5 | 12,48.5 12,50.5 15,53.5 D4.A | 12,48.5 10.27,46.77 LED19.K 7.27,46.77 4,43.5 LED20.K 3.27,40.77 1.5,39 1.5,25.5 3.5,23.5 5,23.5 6.92,21.58 QRE3.6 | D4.A 12.42,57 PWR3.2 4.5,57 2.5,59 2.5,63.5 7.5,68.5 48.5,68.5 52,65 52,53.5 49.24,50.74 M4.J2.2 | M4.J1.4 23.76,45.66 D4.A
  pour Bottom (isolate 1): 0,70 60,70 60,0 0,0
GND5
  Bottom 0.8: LED21.K 87.31,43.5 84.04,46.77 LED22.K 81.04,46.77 79.31,48.5 | LED23.K 79.31,48.5 | 79.31,48.5 79.31,50.5 82.31,53.5 D5.A | 79.31,48.5 77.58,46.77 LED24.K 74.58,46.77 71.31,43.5 LED25.K 70.58,40.77 68.81,39 68.81,25.5 70.81,23.5 72.31,23.5 74.23,21.58 QRE4.6 | D5.A 79.73,57 PWR4.2 71.81,57 69.81,59 69.81,63.5 74.81,68.5 115.81,68.5 119.31,65 119.31,53.5 116.55,50.74 M5.J2.2 | M5.J1.4 91.07,45.66 D5.A
  pour Bottom (isolate 1): 67.31,70 127.31,70 127.31,0 67.31,0
GND6
  Bottom 0.8: LED26.K 153.35,43.5 150.08,46.77 LED27.K 147.08,46.77 145.35,48.5 | LED28.K 145.35,48.5 | 145.35,48.5 145.35,50.5 148.35,53.5 D6.A | 145.35,48.5 143.62,46.77 LED29.K 140.62,46.77 137.35,43.5 LED30.K 136.62,40.77 134.85,39 134.85,25.5 136.85,23.5 138.35,23.5 140.27,21.58 QRE5.6 | D6.A 145.77,57 PWR5.2 137.85,57 135.85,59 135.85,63.5 140.85,68.5 181.85,68.5 185.35,65 185.35,53.5 182.59,50.74 M6.J2.2 | M6.J1.4 157.11,45.66 D6.A
  pour Bottom (isolate 1): 133.35,70 193.35,70 193.35,0 133.35,0
GND7
  Bottom 0.8: JP1.8 91.47,161.67 84.01,169.13 U7.GND | JP1.10 86.39,161.3 83.55,164.14 77,164.14 74.01,167.13 U6.GND | JP1.6 96.55,165.59 94.01,168.13 U8.GND | U9.GND 104.01,167.05 101.63,164.67 JP1.4 | JP1.2 106.71,161.75 114.01,169.05 U10.GND
  pour Bottom (isolate 0.8): 66.55,184.59 126.55,184.59 126.55,154.59 66.55,154.59
GND8
  Bottom 0.8: JP3.8 157.51,161.67 150.05,169.13 U12.GND | JP3.10 152.43,161.3 149.59,164.14 143.04,164.14 140.05,167.13 U11.GND | JP3.6 162.59,165.59 160.05,168.13 U13.GND | U14.GND 170.05,167.05 167.67,164.67 JP3.4 | JP3.2 172.75,161.75 180.05,169.05 U15.GND
  pour Bottom (isolate 0.8): 132.59,184.59 192.59,184.59 192.59,154.59 132.59,154.59
GND9
  Bottom 0.8: JP4.8 25.43,201.04 17.97,208.5 U17.GND | JP4.10 20.35,200.67 17.51,203.51 10.96,203.51 7.97,206.5 U16.GND | JP4.6 30.51,204.96 27.97,207.5 U18.GND | U19.GND 37.97,206.42 35.59,204.04 JP4.4 | JP4.2 40.67,201.12 47.97,208.42 U20.GND
  pour Bottom (isolate 0.8): 0.51,223.96 60.51,223.96 60.51,193.96 0.51,193.96
GND10
  Bottom 0.8: JP5.8 91.47,201.04 84.01,208.5 U22.GND | JP5.10 86.39,200.67 83.55,203.51 77,203.51 74.01,206.5 U21.GND | JP5.6 96.55,204.96 94.01,207.5 U23.GND | U24.GND 104.01,206.42 101.63,204.04 JP5.4 | JP5.2 106.71,201.12 114.01,208.42 U25.GND
  pour Bottom (isolate 0.8): 66.55,223.96 126.55,223.96 126.55,193.96 66.55,193.96
GND11
  Bottom 0.8: JP6.8 157.51,201.04 150.05,208.5 U27.GND | JP6.10 152.43,200.67 149.59,203.51 143.04,203.51 140.05,206.5 U26.GND | JP6.6 162.59,204.96 160.05,207.5 U28.GND | U29.GND 170.05,206.42 167.67,204.04 JP6.4 | JP6.2 172.75,201.12 180.05,208.42 U30.GND
  pour Bottom (isolate 0.8): 132.59,223.96 192.59,223.96 192.59,193.96 132.59,193.96
GND12
  Bottom 0.8: JP7.8 25.43,239.14 17.97,246.6 U32.GND | JP7.10 20.35,238.77 17.51,241.61 10.96,241.61 7.97,244.6 U31.GND | JP7.6 30.51,243.06 27.97,245.6 U33.GND | U34.GND 37.97,244.52 35.59,242.14 JP7.4 | JP7.2 40.67,239.22 47.97,246.52 U35.GND
  pour Bottom (isolate 0.8): 0.51,262.06 60.51,262.06 60.51,232.06 0.51,232.06
GND13
  Bottom 0.8: JP8.8 91.47,239.14 84.01,246.6 U37.GND | JP8.10 86.39,238.77 83.55,241.61 77,241.61 74.01,244.6 U36.GND | JP8.6 96.55,243.06 94.01,245.6 U38.GND | U39.GND 104.01,244.52 101.63,242.14 JP8.4 | JP8.2 106.71,239.22 114.01,246.52 U40.GND
  pour Bottom (isolate 0.8): 66.55,262.06 126.55,262.06 126.55,232.06 66.55,232.06
GND14
  Bottom 0.8: JP9.8 157.51,239.14 150.05,246.6 U42.GND | JP9.10 152.43,238.77 149.59,241.61 143.04,241.61 140.05,244.6 U41.GND | JP9.6 162.59,243.06 160.05,245.6 U43.GND | U44.GND 170.05,244.52 167.67,242.14 JP9.4 | JP9.2 172.75,239.22 180.05,246.52 U45.GND
  pour Bottom (isolate 0.8): 132.59,262.06 192.59,262.06 192.59,232.06 132.59,232.06
IN1
  Bottom 0.8: L298.2 33.19,135.51 35.07,133.63 35.07,111.77 32.46,109.16 M1.J1.9
IN2
  Bottom 0.8: M1.J1.10 33.92,106.62 36.67,109.37 36.67,135.03 35.73,135.97 L298.3
IN3
  Bottom 0.8: L298.4 38.27,106.97 35.38,104.08 M1.J1.11
IN4
  Bottom 0.8: M1.J1.12 36.84,101.54 40.31,105.01 40.31,136.01 41,136.7 41,138.51 L298.5
IN5
  Bottom 0.8: L1.2 100.5,135.51 102.38,133.63 102.38,111.77 99.77,109.16 M2.J1.9
IN6
  Bottom 0.8: M2.J1.10 101.23,106.62 103.98,109.37 103.98,135.03 103.04,135.97 L1.3
IN7
  Bottom 0.8: L1.4 105.58,106.97 102.69,104.08 M2.J1.11
IN8
  Bottom 0.8: M2.J1.12 104.15,101.54 107.62,105.01 107.62,136.01 108.31,136.7 108.31,138.51 L1.5
IN9
  Bottom 0.8: L2.2 166.54,135.51 168.42,133.63 168.42,111.77 165.81,109.16 M3.J1.9
IN10
  Bottom 0.8: M3.J1.10 167.27,106.62 170.02,109.37 170.02,135.03 169.08,135.97 L2.3
IN11
  Bottom 0.8: L2.4 171.62,106.97 168.73,104.08 M3.J1.11
IN12
  Bottom 0.8: M3.J1.12 170.19,101.54 173.66,105.01 173.66,136.01 174.35,136.7 174.35,138.51 L2.5
IN13
  Bottom 0.8: L3.2 33.19,59.31 35.07,57.43 35.07,35.57 32.46,32.96 M4.J1.9
IN14
  Bottom 0.8: M4.J1.10 33.92,30.42 36.67,33.17 36.67,58.83 35.73,59.77 L3.3
IN15
  Bottom 0.8: L3.4 38.27,30.77 35.38,27.88 M4.J1.11
IN16
  Bottom 0.8: M4.J1.12 36.84,25.34 40.31,28.81 40.31,59.81 41,60.5 41,62.31 L3.5
IN17
  Bottom 0.8: L4.2 100.5,59.31 102.38,57.43 102.38,35.57 99.77,32.96 M5.J1.9
IN18
  Bottom 0.8: M5.J1.10 101.23,30.42 103.98,33.17 103.98,58.83 103.04,59.77 L4.3
IN19
  Bottom 0.8: L4.4 105.58,30.77 102.69,27.88 M5.J1.11
IN20
  Bottom 0.8: M5.J1.12 104.15,25.34 107.62,28.81 107.62,59.81 108.31,60.5 108.31,62.31 L4.5
IN21
  Bottom 0.8: L5.2 166.54,59.31 168.42,57.43 168.42,35.57 165.81,32.96 M6.J1.9
IN22
  Bottom 0.8: M6.J1.10 167.27,30.42 170.02,33.17 170.02,58.83 169.08,59.77 L5.3
IN23
  Bottom 0.8: L5.4 171.62,30.77 168.73,27.88 M6.J1.11
IN24
  Bottom 0.8: M6.J1.12 170.19,25.34 173.66,28.81 173.66,59.81 174.35,60.5 174.35,62.31 L5.5
N$1
  Bottom 0.8: LED1.A R1.P$2 | R1.P$2
N$2
  Bottom 0.8: R2.P$2 LED2.A | LED2.A
N$3
  Bottom 0.8: LED3.A | LED3.A R3.P$2
N$4
  Bottom 0.8: R4.P$2 | R4.P$2 LED4.A
N$5
  Bottom 0.8: LED5.A | LED5.A R5.P$2
N$6
  Bottom 0.8: LED6.A R6.P$2 | R6.P$2
N$7
  Bottom 0.8: R7.P$2 LED7.A | LED7.A
N$8
  Bottom 0.8: LED8.A | LED8.A R8.P$2
N$9
  Bottom 0.8: R9.P$2 | R9.P$2 LED9.A
N$10
  Bottom 0.8: LED10.A | LED10.A R10.P$2
N$11
  Bottom 0.8: LED11.A R11.P$2 | R11.P$2
N$12
  Bottom 0.8: R12.P$2 LED12.A | LED12.A
N$13
  Bottom 0.8: LED13.A | LED13.A R13.P$2
N$14
  Bottom 0.8: R14.P$2 | R14.P$2 LED14.A
N$15
  Bottom 0.8: LED15.A | LED15.A R15.P$2
N$16
  Bottom 0.8: LED16.A R16.P$2 | R16.P$2
N$17
  Bottom 0.8: R17.P$2 LED17.A | LED17.A
N$18
  Bottom 0.8: LED18.A | LED18.A R18.P$2
N$19
  Bottom 0.8: R19.P$2 | R19.P$2 LED19.A
N$20
  Bottom 0.8: LED20.A | LED20.A R20.P$2
N$21
  Bottom 0.8: LED21.A R21.P$2 | R21.P$2
N$22
  Bottom 0.8: R22.P$2 LED22.A | LED22.A
N$23
  Bottom 0.8: LED23.A | LED23.A R23.P$2
N$24
  Bottom 0.8: R24.P$2 | R24.P$2 LED24.A
N$25
  Bottom 0.8: LED25.A | LED25.A R25.P$2
N$26
  Bottom 0.8: LED26.A R26.P$2 | R26.P$2
N$27
  Bottom 0.8: R27.P$2 LED27.A | LED27.A
N$28
  Bottom 0.8: LED28.A | LED28.A R28.P$2
N$29
  Bottom 0.8: R29.P$2 | R29.P$2 LED29.A
N$30
  Bottom 0.8: LED30.A | LED30.A R30.P$2
VCC
  Bottom 0.8: U5.VCC 53.05,171.05 50.01,174.09 41.01,174.09 | 10.51,174.09 7.01,174.09 4.51,171.59 4.51,167.09 9.2,162.4 15.81,162.4 17.81,160.4 JP2.11 | 10.51,174.09 20.51,174.09 | 20.51,174.09 30.51,174.09 | 30.51,174.09 41.01,174.09 | U1.VCC 13.05,171.55 10.51,174.09 | U2.VCC 23.05,171.55 20.51,174.09 | 30.51,174.09 33.05,171.55 U3.VCC | 41.01,174.09 43.05,172.05 U4.VCC
VCC1
  Bottom 0.8: U10.VCC 119.09,171.05 116.05,174.09 107.05,174.09 | 76.55,174.09 73.05,174.09 70.55,171.59 70.55,167.09 75.24,162.4 81.85,162.4 83.85,160.4 JP1.11 | 76.55,174.09 86.55,174.09 | 86.55,174.09 96.55,174.09 | 96.55,174.09 107.05,174.09 | U6.VCC 79.09,171.55 76.55,174.09 | U7.VCC 89.09,171.55 86.55,174.09 | 96.55,174.09 99.09,171.55 U8.VCC | 107.05,174.09 109.09,172.05 U9.VCC
VCC2
  Bottom 0.8: U15.VCC 185.13,171.05 182.09,174.09 173.09,174.09 | 142.59,174.09 139.09,174.09 136.59,171.59 136.59,167.09 141.28,162.4 147.89,162.4 149.89,160.4 JP3.11 | 142.59,174.09 152.59,174.09 | 152.59,174.09 162.59,174.09 | 162.59,174.09 173.09,174.09 | U11.VCC 145.13,171.55 142.59,174.09 | U12.VCC 155.13,171.55 152.59,174.09 | 162.59,174.09 165.13,171.55 U13.VCC | 173.09,174.09 175.13,172.05 U14.VCC
VCC3
  Bottom 0.8: U20.VCC 53.05,210.42 50.01,213.46 41.01,213.46 | 10.51,213.46 7.01,213.46 4.51,210.96 4.51,206.46 9.2,201.77 15.81,201.77 17.81,199.77 JP4.11 | 10.51,213.46 20.51,213.46 | 20.51,213.46 30.51,213.46 | 30.51,213.46 41.01,213.46 | U16.VCC 13.05,210.92 10.51,213.46 | U17.VCC 23.05,210.92 20.51,213.46 | 30.51,213.46 33.05,210.92 U18.VCC | 41.01,213.46 43.05,211.42 U19.VCC
VCC4
  Bottom 0.8: U25.VCC 119.09,210.42 116.05,213.46 107.05,213.46 | 76.55,213.46 73.05,213.46 70.55,210.96 70.55,206.46 75.24,201.77 81.85,201.77 83.85,199.77 JP5.11 | 76.55,213.46 86.55,213.46 | 86.55,213.46 96.55,213.46 | 96.55,213.46 107.05,213.46 | U21.VCC 79.09,210.92 76.55,213.46 | U22.VCC 89.09,210.92 86.55,213.46 | 96.55,213.46 99.09,210.92 U23.VCC | 107.05,213.46 109.09,211.42 U24.VCC
VCC5
  Bottom 0.8: U30.VCC 185.13,210.42 182.09,213.46 173.09,213.46 | 142.59,213.46 139.09,213.46 136.59,210.96 136.59,206.46 141.28,201.77 147.89,201.77 149.89,199.77 JP6.11 | 142.59,213.46 152.59,213.46 | 152.59,213.46 162.59,213.46 | 162.59,213.46 173.09,213.46 | U26.VCC 145.13,210.92 142.59,213.46 | U27.VCC 155.13,210.92 152.59,213.46 | 162.59,213.46 165.13,210.92 U28.VCC | 173.09,213.46 175.13,211.42 U29.VCC
VCC6
  Bottom 0.8: U35.VCC 53.05,248.52 50.01,251.56 41.01,251.56 | 10.51,251.56 7.01,251.56 4.51,249.06 4.51,244.56 9.2,239.87 15.81,239.87 17.81,237.87 JP7.11 | 10.51,251.56 20.51,251.56 | 20.51,251.56 30.51,251.56 | 30.51,251.56 41.01,251.56 | U31.VCC 13.05,249.02 10.51,251.56 | U32.VCC 23.05,249.02 20.51,251.56 | 30.51,251.56 33.05,249.02 U33.VCC | 41.01,251.56 43.05,249.52 U34.VCC
VCC7
  Bottom 0.8: U40.VCC 119.09,248.52 116.05,251.56 107.05,251.56 | 76.55,251.56 73.05,251.56 70.55,249.06 70.55,244.56 75.24,239.87 81.85,239.87 83.85,237.87 JP8.11 | 76.55,251.56 86.55,251.56 | 86.55,251.56 96.55,251.56 | 96.55,251.56 107.05,251.56 | U36.VCC 79.09,249.02 76.55,251.56 | U37.VCC 89.09,249.02 86.55,251.56 | 96.55,251.56 99.09,249.02 U38.VCC | 107.05,251.56 109.09,249.52 U39.VCC
VCC8
  Bottom 0.8: U45.VCC 185.13,248.52 182.09,251.56 173.09,251.56 | 142.59,251.56 139.09,251.56 136.59,249.06 136.59,244.56 141.28,239.87 147.89,239.87 149.89,237.87 JP9.11 | 142.59,251.56 152.59,251.56 | 152.59,251.56 162.59,251.56 | 162.59,251.56 173.09,251.56 | U41.VCC 145.13,249.02 142.59,251.56 | U42.VCC 155.13,249.02 152.59,251.56 | 162.59,251.56 165.13,249.02 U43.VCC | 173.09,251.56 175.13,249.52 U44.VCC
VIN
  Bottom 1.016: PWR.1 12.42,138.2 D1.C 16,141.78 44.92,141.78 48,138.7 48,131.7 45.78,129.48 M1.J2.1
VIN1
  Bottom 1.016: PWR1.1 79.73,138.2 D2.C 83.31,141.78 112.23,141.78 115.31,138.7 115.31,131.7 113.09,129.48 M2.J2.1
VIN2
  Bottom 1.016: PWR2.1 145.77,138.2 D3.C 149.35,141.78 178.27,141.78 181.35,138.7 181.35,131.7 179.13,129.48 M3.J2.1
VIN3
  Bottom 1.016: PWR3.1 12.42,62 D4.C 16,65.58 44.92,65.58 48,62.5 48,55.5 45.78,53.28 M4.J2.1
VIN4
  Bottom 1.016: PWR4.1 79.73,62 D5.C 83.31,65.58 112.23,65.58 115.31,62.5 115.31,55.5 113.09,53.28 M5.J2.1
VIN5
  Bottom 1.016: PWR5.1 145.77,62 D6.C 149.35,65.58 178.27,65.58 181.35,62.5 181.35,55.5 179.13,53.28 M6.J2.1

## Text on the board
Bottom: G4 | G4 | G4 | G4 | G4 | G4 | G4 | G4 | G4 | G4 | G4 | G4 | G4 | G4 | G4